# Altium PCB nrf24l01_cell(P40).PcbDoc (part 9 of 11)
Units mm, origin at the board's own origin, x right, y up, seen from the top; angles counter-clockwise.
Board outline 136.2 x 112.2 mm, 2 copper layers (TopLayer, BottomLayer); 520 components, 0 nets, 2804 pads, 1040 vias.
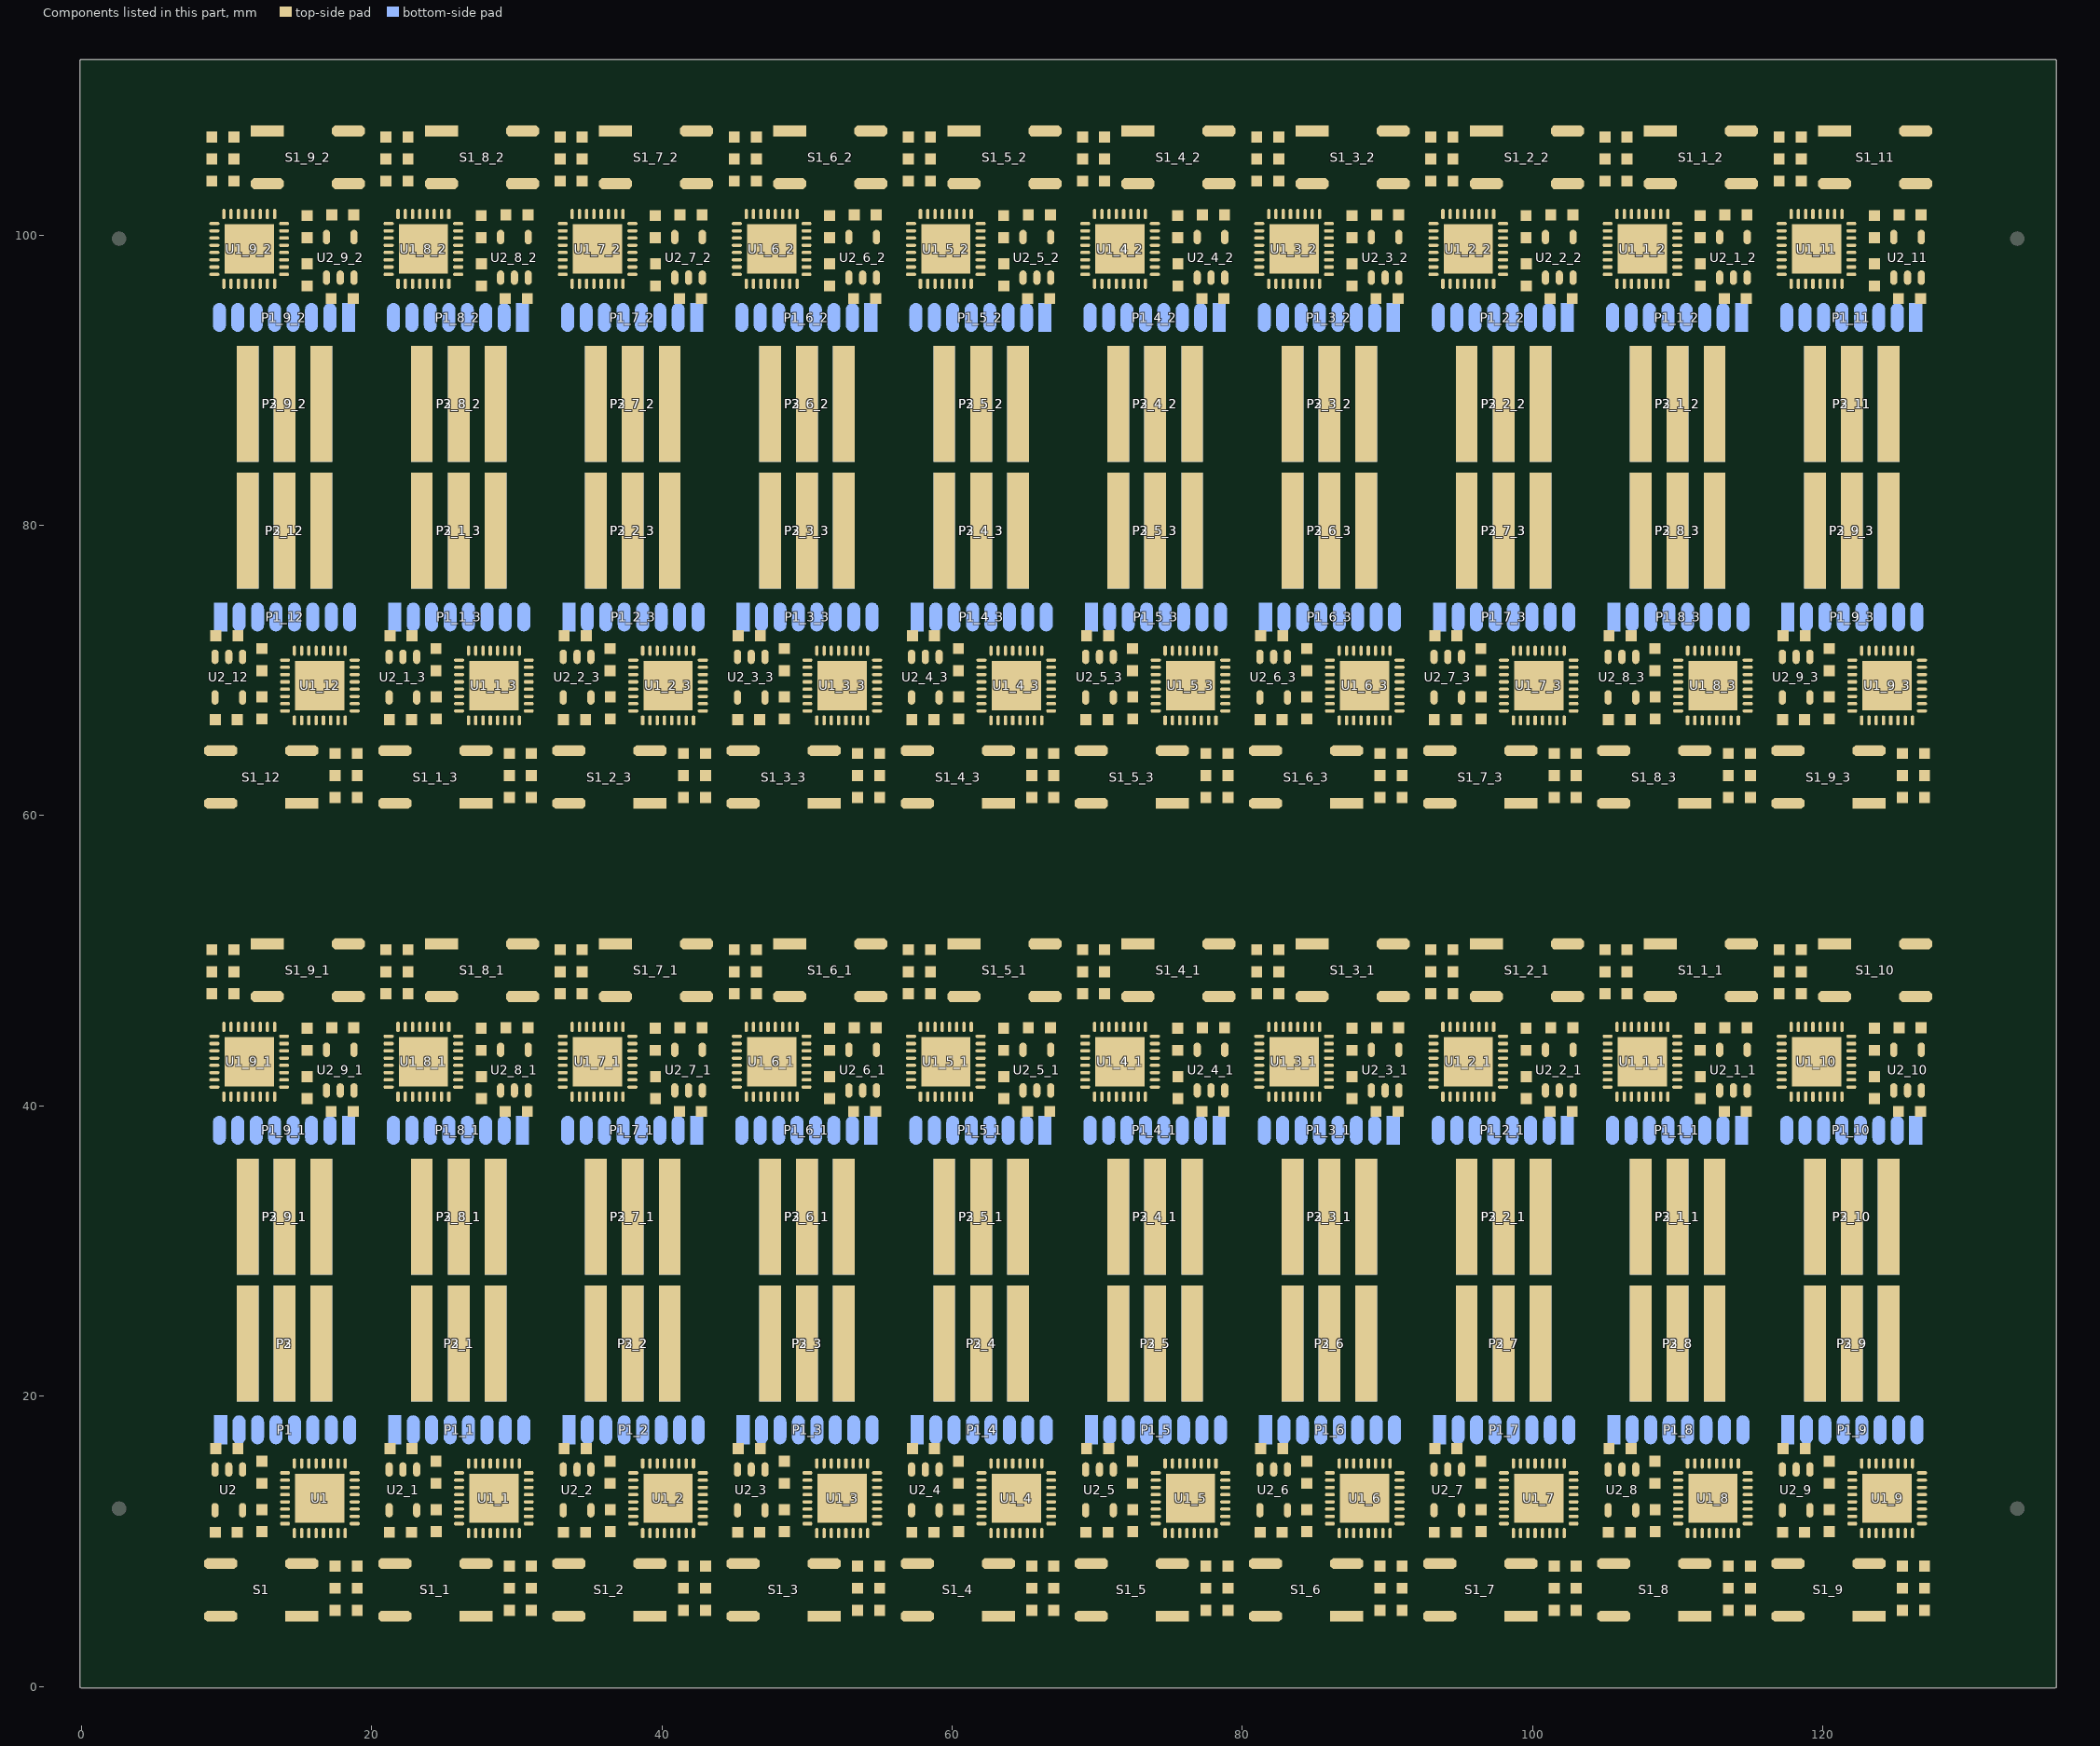
[diagram p9: the components of this part, seen from the top]

## Via types
v1: diameter 0.4, hole 0.2, TopLayer to BottomLayer, tented both sides, 1040 vias

## Nets (pads, with @x,y where several pads share a name; then routed paths per layer and width w, separated by ;. In a path a pad name is that pad's centre, name@x,y a point inside that pad or via, vN(x,y) a via of type N, cw(c..) or ccw(c..) an arc to the next point about the centre after c; other vN are vias at no path point) (continued)
copper on no net: (continued)
  BottomLayer w0.203: v1@8.48,38.15 ccw(c8.312,38.318) 8.55,38.318 ccw(c8.788,38.318) v1@8.62,38.15 ; v1@8.48,43.72 cw(c8.312,43.552) 8.55,43.552 cw(c8.788,43.552) v1@8.62,43.72 ; v1@8.48,94.15 ccw(c8.312,94.318) 8.55,94.318 ccw(c8.788,94.318) v1@8.62,94.15 ; v1@8.48,99.72 cw(c8.312,99.552) 8.55,99.552 cw(c8.788,99.552) v1@8.62,99.72 ; v1(8.55,38.08) v1(8.55,43.79) ; v1(8.55,94.08) v1(8.55,99.79) ; v1@8.62,17.86 cw(c8.428,17.668) 8.7,17.668 ; v1@8.62,73.86 cw(c8.428,73.668) 8.7,73.668 ; 8.7,17.717 cw(c8.903,17.717) v1@8.76,17.86 ; 8.7,73.717 cw(c8.903,73.717) v1@8.76,73.86 ; v1@8.75,17.93 8.7,17.88 8.7,14.05 9.776,12.974 11.776,12.974 v1(14.03,10.72) ; v1@8.75,73.93 8.7,73.88 8.7,70.05 9.776,68.974 11.776,68.974 v1(14.03,66.72) ; v1(9.01,46.21) 12.03,46.21 v1(14.73,43.51) 14.75,43.49 14.75,42.62 ; v1(9.01,102.21) 12.03,102.21 v1(14.73,99.51) 14.75,99.49 14.75,98.62 ; v1@9.08,46.14 cw(c9.248,45.972) 9.248,46.21 cw(c9.248,46.448) v1@9.08,46.28 ; v1@9.08,102.14 cw(c9.248,101.972) 9.248,102.21 cw(c9.248,102.448) v1@9.08,102.28 ; 9.6,17.68 9.36,17.44 9.36,13.97 9.95,13.38 13.25,13.38 ; 9.6,73.68 9.36,73.44 9.36,69.97 9.95,69.38 13.25,69.38 ; 11.105,19.838 cw(c10.674,19.18) v1@11.46,19.18 ; 11.105,75.838 cw(c10.674,75.18) v1@11.46,75.18 ; 11.216,20.008 cw(c10.92,19.556) 11.46,19.556 cw(c12,19.556) 11.704,20.008 ; 11.216,76.008 cw(c10.92,75.556) 11.46,75.556 cw(c12,75.556) 11.704,76.008 ; v1@11.39,19.21 ccw(c11.222,19.378) 11.46,19.378 ccw(c11.698,19.378) v1@11.53,19.21 ; v1@11.39,75.21 ccw(c11.222,75.378) 11.46,75.378 ccw(c11.698,75.378) v1@11.53,75.21 ; 11.46,23.63 v1@11.46,19.18 ; 11.46,79.63 v1@11.46,75.18 ; 11.815,19.838 ccw(c12.246,19.18) v1@11.46,19.18 ; 11.815,75.838 ccw(c12.246,75.18) v1@11.46,75.18 ; v1@12.79,19.468 ccw(c12.79,19.706) 12.958,19.538 ccw(c13.126,19.37) v1@12.888,19.37 ; v1@12.79,75.468 ccw(c12.79,75.706) 12.958,75.538 ccw(c13.126,75.37) v1@12.888,75.37 ; 13.035,19.615 ccw(c12.269,20.38) 13.352,20.38 ; 13.035,75.615 ccw(c12.269,76.38) 13.352,76.38 ; 13.076,19.656 cw(c13.787,18.944) 13.935,19.94 ; 13.076,75.656 cw(c13.787,74.944) 13.935,75.94 ; v1@13.18,13.87 cw(c13.012,13.702) 13.25,13.702 cw(c13.488,13.702) v1@13.32,13.87 ; v1@13.18,69.87 cw(c13.012,69.702) 13.25,69.702 cw(c13.488,69.702) v1@13.32,69.87 ; 13.25,12.776 ccw(c13.556,12.776) v1@13.34,12.56 ; v1(13.25,13.94) 13.25,13.38 ; 13.25,68.776 ccw(c13.556,68.776) v1@13.34,68.56 ; v1(13.25,69.94) 13.25,69.38 ; v1@13.27,12.392 cw(c13.27,12.154) 13.438,12.322 cw(c13.606,12.49) v1@13.368,12.49 ; v1@13.27,68.392 cw(c13.27,68.154) 13.438,68.322 cw(c13.606,68.49) v1@13.368,68.49 ; 13.361,19.941 cw(c13.861,19.441) 13.965,20.141 ; 13.361,75.941 cw(c13.861,75.441) 13.965,76.141 ; 13.905,19.739 ccw(c13.714,18.446) v1(12.79,19.37) 14,20.58 14,23.63 ; 13.905,75.739 ccw(c13.714,74.446) v1(12.79,75.37) 14,76.58 14,79.63 ; v1@13.932,10.72 ccw(c13.694,10.72) 13.862,10.888 ccw(c14.03,11.056) v1@14.03,10.818 ; v1@13.932,66.72 ccw(c13.694,66.72) 13.862,66.888 ccw(c14.03,67.056) v1@14.03,66.818 ; v1@13.97,45.182 cw(c13.97,44.944) 14.138,45.112 cw(c14.306,45.28) v1@14.068,45.28 ; v1(13.97,45.28) 16.224,43.026 18.224,43.026 19.3,41.95 19.3,38.12 v1@19.25,38.07 ; v1@13.97,101.182 cw(c13.97,100.944) 14.138,101.112 cw(c14.306,101.28) v1@14.068,101.28 ; v1(13.97,101.28) 16.224,99.026 18.224,99.026 19.3,97.95 19.3,94.12 v1@19.25,94.07 ; 14,32.37 14,35.42 v1(15.21,36.63) cw(c14.286,37.554) 14.095,36.261 ; 14,88.37 14,91.42 v1(15.21,92.63) cw(c14.286,93.554) 14.095,92.261 ; 14.035,35.859 ccw(c14.139,36.559) 14.639,36.059 ; 14.035,91.859 ccw(c14.139,92.559) 14.639,92.059 ; 14.065,36.06 ccw(c14.213,37.056) 14.924,36.344 ; 14.065,92.06 ccw(c14.213,93.056) 14.924,92.344 ; v1@14.632,43.51 ccw(c14.394,43.51) 14.562,43.678 ccw(c14.73,43.846) v1@14.73,43.608 ; v1@14.632,99.51 ccw(c14.394,99.51) 14.562,99.678 ccw(c14.73,99.846) v1@14.73,99.608 ; 14.648,35.62 cw(c15.731,35.62) 14.965,36.385 ; 14.648,91.62 cw(c15.731,91.62) 14.965,92.385 ; v1@14.66,43.44 cw(c14.444,43.224) 14.75,43.224 ; v1@14.66,99.44 cw(c14.444,99.224) 14.75,99.224 ; v1@14.68,42.13 ccw(c14.512,42.298) 14.75,42.298 ccw(c14.988,42.298) v1@14.82,42.13 ; v1@14.68,98.13 ccw(c14.512,98.298) 14.75,98.298 ccw(c14.988,98.298) v1@14.82,98.13 ; v1(14.75,42.06) 14.75,42.62 ; v1(14.75,98.06) 14.75,98.62 ; v1@15.112,36.63 cw(c14.874,36.63) 15.042,36.462 cw(c15.21,36.294) v1@15.21,36.532 ; v1@15.112,92.63 cw(c14.874,92.63) 15.042,92.462 cw(c15.21,92.294) v1@15.21,92.532 ; 16.185,36.162 ccw(c15.754,36.82) v1@16.54,36.82 ; 16.185,92.162 ccw(c15.754,92.82) v1@16.54,92.82 ; 16.296,35.992 ccw(c16,36.444) 16.54,36.444 ccw(c17.08,36.444) 16.784,35.992 ; 16.296,91.992 ccw(c16,92.444) 16.54,92.444 ccw(c17.08,92.444) 16.784,91.992 ; v1@16.47,36.79 cw(c16.302,36.622) 16.54,36.622 cw(c16.778,36.622) v1@16.61,36.79 ; v1@16.47,92.79 cw(c16.302,92.622) 16.54,92.622 cw(c16.778,92.622) v1@16.61,92.79 ; 16.54,32.37 v1@16.54,36.82 ; 16.54,88.37 v1@16.54,92.82 ; 16.895,36.162 cw(c17.326,36.82) v1@16.54,36.82 ; 16.895,92.162 cw(c17.326,92.82) v1@16.54,92.82 ; 18.4,38.32 18.64,38.56 18.64,42.03 18.05,42.62 14.75,42.62 ; 18.4,94.32 18.64,94.56 18.64,98.03 18.05,98.62 14.75,98.62 ; v1@18.92,9.72 ccw(c18.752,9.552) 18.752,9.79 ccw(c18.752,10.028) v1@18.92,9.86 ; v1@18.92,65.72 ccw(c18.752,65.552) 18.752,65.79 ccw(c18.752,66.028) v1@18.92,65.86 ; v1(18.99,9.79) 15.97,9.79 v1(13.27,12.49) 13.25,12.51 13.25,13.38 ; v1(18.99,65.79) 15.97,65.79 v1(13.27,68.49) 13.25,68.51 13.25,69.38 ; v1@19.24,38.14 ccw(c19.097,38.283) 19.3,38.283 ; v1@19.24,94.14 ccw(c19.097,94.283) 19.3,94.283 ; 19.3,38.332 ccw(c19.572,38.332) v1@19.38,38.14 ; 19.3,94.332 ccw(c19.572,94.332) v1@19.38,94.14 ; v1@19.38,12.28 ccw(c19.212,12.448) 19.45,12.448 ccw(c19.688,12.448) v1@19.52,12.28 ; v1@19.38,17.85 cw(c19.212,17.682) 19.45,17.682 cw(c19.688,17.682) v1@19.52,17.85 ; v1@19.38,68.28 ccw(c19.212,68.448) 19.45,68.448 ccw(c19.688,68.448) v1@19.52,68.28 ; v1@19.38,73.85 cw(c19.212,73.682) 19.45,73.682 cw(c19.688,73.682) v1@19.52,73.85 ; v1(19.45,12.21) v1(19.45,17.92) ; v1(19.45,68.21) v1(19.45,73.92) ; v1@20.48,38.15 ccw(c20.312,38.318) 20.55,38.318 ccw(c20.788,38.318) v1@20.62,38.15 ; v1@20.48,43.72 cw(c20.312,43.552) 20.55,43.552 cw(c20.788,43.552) v1@20.62,43.72 ; v1@20.48,94.15 ccw(c20.312,94.318) 20.55,94.318 ccw(c20.788,94.318) v1@20.62,94.15 ; v1@20.48,99.72 cw(c20.312,99.552) 20.55,99.552 cw(c20.788,99.552) v1@20.62,99.72 ; v1(20.55,38.08) v1(20.55,43.79) ; v1(20.55,94.08) v1(20.55,99.79) ; v1@20.62,17.86 cw(c20.428,17.668) 20.7,17.668 ; v1@20.62,73.86 cw(c20.428,73.668) 20.7,73.668 ; 20.7,17.717 cw(c20.903,17.717) v1@20.76,17.86 ; 20.7,73.717 cw(c20.903,73.717) v1@20.76,73.86 ; v1@20.75,17.93 20.7,17.88 20.7,14.05 21.776,12.974 23.776,12.974 v1(26.03,10.72) ; v1@20.75,73.93 20.7,73.88 20.7,70.05 21.776,68.974 23.776,68.974 v1(26.03,66.72) ; v1(21.01,46.21) 24.03,46.21 v1(26.73,43.51) 26.75,43.49 26.75,42.62 ; v1(21.01,102.21) 24.03,102.21 v1(26.73,99.51) 26.75,99.49 26.75,98.62 ; v1@21.08,46.14 cw(c21.248,45.972) 21.248,46.21 cw(c21.248,46.448) v1@21.08,46.28 ; v1@21.08,102.14 cw(c21.248,101.972) 21.248,102.21 cw(c21.248,102.448) v1@21.08,102.28 ; 21.6,17.68 21.36,17.44 21.36,13.97 21.95,13.38 25.25,13.38 ; 21.6,73.68 21.36,73.44 21.36,69.97 21.95,69.38 25.25,69.38 ; 23.105,19.838 cw(c22.674,19.18) v1@23.46,19.18 ; 23.105,75.838 cw(c22.674,75.18) v1@23.46,75.18 ; 23.216,20.008 cw(c22.92,19.556) 23.46,19.556 cw(c24,19.556) 23.704,20.008 ; 23.216,76.008 cw(c22.92,75.556) 23.46,75.556 cw(c24,75.556) 23.704,76.008 ; v1@23.39,19.21 ccw(c23.222,19.378) 23.46,19.378 ccw(c23.698,19.378) v1@23.53,19.21 ; v1@23.39,75.21 ccw(c23.222,75.378) 23.46,75.378 ccw(c23.698,75.378) v1@23.53,75.21 ; 23.46,23.63 v1@23.46,19.18 ; 23.46,79.63 v1@23.46,75.18 ; 23.815,19.838 ccw(c24.246,19.18) v1@23.46,19.18 ; 23.815,75.838 ccw(c24.246,75.18) v1@23.46,75.18 ; v1@24.79,19.468 ccw(c24.79,19.706) 24.958,19.538 ccw(c25.126,19.37) v1@24.888,19.37 ; v1@24.79,75.468 ccw(c24.79,75.706) 24.958,75.538 ccw(c25.126,75.37) v1@24.888,75.37 ; 25.035,19.615 ccw(c24.269,20.38) 25.352,20.38 ; 25.035,75.615 ccw(c24.269,76.38) 25.352,76.38 ; 25.076,19.656 cw(c25.787,18.944) 25.935,19.94 ; 25.076,75.656 cw(c25.787,74.944) 25.935,75.94 ; v1@25.18,13.87 cw(c25.012,13.702) 25.25,13.702 cw(c25.488,13.702) v1@25.32,13.87 ; v1@25.18,69.87 cw(c25.012,69.702) 25.25,69.702 cw(c25.488,69.702) v1@25.32,69.87 ; 25.25,12.776 ccw(c25.556,12.776) v1@25.34,12.56 ; v1(25.25,13.94) 25.25,13.38 ; 25.25,68.776 ccw(c25.556,68.776) v1@25.34,68.56 ; v1(25.25,69.94) 25.25,69.38 ; v1@25.27,12.392 cw(c25.27,12.154) 25.438,12.322 cw(c25.606,12.49) v1@25.368,12.49 ; v1@25.27,68.392 cw(c25.27,68.154) 25.438,68.322 cw(c25.606,68.49) v1@25.368,68.49 ; 25.361,19.941 cw(c25.861,19.441) 25.965,20.141 ; 25.361,75.941 cw(c25.861,75.441) 25.965,76.141 ; 25.905,19.739 ccw(c25.714,18.446) v1(24.79,19.37) 26,20.58 26,23.63 ; 25.905,75.739 ccw(c25.714,74.446) v1(24.79,75.37) 26,76.58 26,79.63 ; v1@25.932,10.72 ccw(c25.694,10.72) 25.862,10.888 ccw(c26.03,11.056) v1@26.03,10.818 ; v1@25.932,66.72 ccw(c25.694,66.72) 25.862,66.888 ccw(c26.03,67.056) v1@26.03,66.818 ; v1@25.97,45.182 cw(c25.97,44.944) 26.138,45.112 cw(c26.306,45.28) v1@26.068,45.28 ; v1(25.97,45.28) 28.224,43.026 30.224,43.026 31.3,41.95 31.3,38.12 v1@31.25,38.07 ; v1@25.97,101.182 cw(c25.97,100.944) 26.138,101.112 cw(c26.306,101.28) v1@26.068,101.28 ; v1(25.97,101.28) 28.224,99.026 30.224,99.026 31.3,97.95 31.3,94.12 v1@31.25,94.07 ; 26,32.37 26,35.42 v1(27.21,36.63) cw(c26.286,37.554) 26.095,36.261 ; 26,88.37 26,91.42 v1(27.21,92.63) cw(c26.286,93.554) 26.095,92.261 ; 26.035,35.859 ccw(c26.139,36.559) 26.639,36.059 ; 26.035,91.859 ccw(c26.139,92.559) 26.639,92.059 ; 26.065,36.06 ccw(c26.213,37.056) 26.924,36.344 ; 26.065,92.06 ccw(c26.213,93.056) 26.924,92.344 ; v1@26.632,43.51 ccw(c26.394,43.51) 26.562,43.678 ccw(c26.73,43.846) v1@26.73,43.608 ; v1@26.632,99.51 ccw(c26.394,99.51) 26.562,99.678 ccw(c26.73,99.846) v1@26.73,99.608 ; 26.648,35.62 cw(c27.731,35.62) 26.965,36.385 ; 26.648,91.62 cw(c27.731,91.62) 26.965,92.385 ; v1@26.66,43.44 cw(c26.444,43.224) 26.75,43.224 ; v1@26.66,99.44 cw(c26.444,99.224) 26.75,99.224 ; v1@26.68,42.13 ccw(c26.512,42.298) 26.75,42.298 ccw(c26.988,42.298) v1@26.82,42.13 ; v1@26.68,98.13 ccw(c26.512,98.298) 26.75,98.298 ccw(c26.988,98.298) v1@26.82,98.13 ; v1(26.75,42.06) 26.75,42.62 ; v1(26.75,98.06) 26.75,98.62 ; v1@27.112,36.63 cw(c26.874,36.63) 27.042,36.462 cw(c27.21,36.294) v1@27.21,36.532 ; v1@27.112,92.63 cw(c26.874,92.63) 27.042,92.462 cw(c27.21,92.294) v1@27.21,92.532 ; 28.185,36.162 ccw(c27.754,36.82) v1@28.54,36.82 ; 28.185,92.162 ccw(c27.754,92.82) v1@28.54,92.82 ; 28.296,35.992 ccw(c28,36.444) 28.54,36.444 ccw(c29.08,36.444) 28.784,35.992 ; 28.296,91.992 ccw(c28,92.444) 28.54,92.444 ccw(c29.08,92.444) 28.784,91.992 ; v1@28.47,36.79 cw(c28.302,36.622) 28.54,36.622 cw(c28.778,36.622) v1@28.61,36.79 ; v1@28.47,92.79 cw(c28.302,92.622) 28.54,92.622 cw(c28.778,92.622) v1@28.61,92.79 ; 28.54,32.37 v1@28.54,36.82 ; 28.54,88.37 v1@28.54,92.82 ; 28.895,36.162 cw(c29.326,36.82) v1@28.54,36.82 ; 28.895,92.162 cw(c29.326,92.82) v1@28.54,92.82 ; 30.4,38.32 30.64,38.56 30.64,42.03 30.05,42.62 26.75,42.62 ; 30.4,94.32 30.64,94.56 30.64,98.03 30.05,98.62 26.75,98.62 ; v1@30.92,9.72 ccw(c30.752,9.552) 30.752,9.79 ccw(c30.752,10.028) v1@30.92,9.86 ; v1@30.92,65.72 ccw(c30.752,65.552) 30.752,65.79 ccw(c30.752,66.028) v1@30.92,65.86 ; v1(30.99,9.79) 27.97,9.79 v1(25.27,12.49) 25.25,12.51 25.25,13.38 ; v1(30.99,65.79) 27.97,65.79 v1(25.27,68.49) 25.25,68.51 25.25,69.38 ; v1@31.24,38.14 ccw(c31.097,38.283) 31.3,38.283 ; v1@31.24,94.14 ccw(c31.097,94.283) 31.3,94.283 ; 31.3,38.332 ccw(c31.572,38.332) v1@31.38,38.14 ; 31.3,94.332 ccw(c31.572,94.332) v1@31.38,94.14 ; v1@31.38,12.28 ccw(c31.212,12.448) 31.45,12.448 ccw(c31.688,12.448) v1@31.52,12.28 ; v1@31.38,17.85 cw(c31.212,17.682) 31.45,17.682 cw(c31.688,17.682) v1@31.52,17.85 ; v1@31.38,68.28 ccw(c31.212,68.448) 31.45,68.448 ccw(c31.688,68.448) v1@31.52,68.28 ; v1@31.38,73.85 cw(c31.212,73.682) 31.45,73.682 cw(c31.688,73.682) v1@31.52,73.85 ; v1(31.45,12.21) v1(31.45,17.92) ; v1(31.45,68.21) v1(31.45,73.92) ; v1@32.48,38.15 ccw(c32.312,38.318) 32.55,38.318 ccw(c32.788,38.318) v1@32.62,38.15 ; v1@32.48,43.72 cw(c32.312,43.552) 32.55,43.552 cw(c32.788,43.552) v1@32.62,43.72 ; v1@32.48,94.15 ccw(c32.312,94.318) 32.55,94.318 ccw(c32.788,94.318) v1@32.62,94.15 ; v1@32.48,99.72 cw(c32.312,99.552) 32.55,99.552 cw(c32.788,99.552) v1@32.62,99.72 ; v1(32.55,38.08) v1(32.55,43.79) ; v1(32.55,94.08) v1(32.55,99.79) ; v1@32.62,17.86 cw(c32.428,17.668) 32.7,17.668 ; v1@32.62,73.86 cw(c32.428,73.668) 32.7,73.668 ; 32.7,17.717 cw(c32.903,17.717) v1@32.76,17.86 ; 32.7,73.717 cw(c32.903,73.717) v1@32.76,73.86 ; v1@32.75,17.93 32.7,17.88 32.7,14.05 33.776,12.974 35.776,12.974 v1(38.03,10.72) ; v1@32.75,73.93 32.7,73.88 32.7,70.05 33.776,68.974 35.776,68.974 v1(38.03,66.72) ; v1(33.01,46.21) 36.03,46.21 v1(38.73,43.51) 38.75,43.49 38.75,42.62 ; v1(33.01,102.21) 36.03,102.21 v1(38.73,99.51) 38.75,99.49 38.75,98.62 ; v1@33.08,46.14 cw(c33.248,45.972) 33.248,46.21 cw(c33.248,46.448) v1@33.08,46.28 ; v1@33.08,102.14 cw(c33.248,101.972) 33.248,102.21 cw(c33.248,102.448) v1@33.08,102.28 ; 33.6,17.68 33.36,17.44 33.36,13.97 33.95,13.38 37.25,13.38 ; 33.6,73.68 33.36,73.44 33.36,69.97 33.95,69.38 37.25,69.38 ; 35.105,19.838 cw(c34.674,19.18) v1@35.46,19.18 ; 35.105,75.838 cw(c34.674,75.18) v1@35.46,75.18 ; 35.216,20.008 cw(c34.92,19.556) 35.46,19.556 cw(c36,19.556) 35.704,20.008 ; 35.216,76.008 cw(c34.92,75.556) 35.46,75.556 cw(c36,75.556) 35.704,76.008 ; v1@35.39,19.21 ccw(c35.222,19.378) 35.46,19.378 ccw(c35.698,19.378) v1@35.53,19.21 ; v1@35.39,75.21 ccw(c35.222,75.378) 35.46,75.378 ccw(c35.698,75.378) v1@35.53,75.21 ; 35.46,23.63 v1@35.46,19.18 ; 35.46,79.63 v1@35.46,75.18 ; 35.815,19.838 ccw(c36.246,19.18) v1@35.46,19.18 ; 35.815,75.838 ccw(c36.246,75.18) v1@35.46,75.18 ; v1@36.79,19.468 ccw(c36.79,19.706) 36.958,19.538 ccw(c37.126,19.37) v1@36.888,19.37 ; v1@36.79,75.468 ccw(c36.79,75.706) 36.958,75.538 ccw(c37.126,75.37) v1@36.888,75.37 ; 37.035,19.615 ccw(c36.269,20.38) 37.352,20.38 ; 37.035,75.615 ccw(c36.269,76.38) 37.352,76.38 ; 37.076,19.656 cw(c37.787,18.944) 37.935,19.94 ; 37.076,75.656 cw(c37.787,74.944) 37.935,75.94 ; v1@37.18,13.87 cw(c37.012,13.702) 37.25,13.702 cw(c37.488,13.702) v1@37.32,13.87 ; v1@37.18,69.87 cw(c37.012,69.702) 37.25,69.702 cw(c37.488,69.702) v1@37.32,69.87 ; 37.25,12.776 ccw(c37.556,12.776) v1@37.34,12.56 ; v1(37.25,13.94) 37.25,13.38 ; 37.25,68.776 ccw(c37.556,68.776) v1@37.34,68.56 ; v1(37.25,69.94) 37.25,69.38 ; v1@37.27,12.392 cw(c37.27,12.154) 37.438,12.322 cw(c37.606,12.49) v1@37.368,12.49 ; v1@37.27,68.392 cw(c37.27,68.154) 37.438,68.322 cw(c37.606,68.49) v1@37.368,68.49 ; 37.361,19.941 cw(c37.861,19.441) 37.965,20.141 ; 37.361,75.941 cw(c37.861,75.441) 37.965,76.141 ; 37.905,19.739 ccw(c37.714,18.446) v1(36.79,19.37) 38,20.58 38,23.63 ; 37.905,75.739 ccw(c37.714,74.446) v1(36.79,75.37) 38,76.58 38,79.63 ; v1@37.932,10.72 ccw(c37.694,10.72) 37.862,10.888 ccw(c38.03,11.056) v1@38.03,10.818 ; v1@37.932,66.72 ccw(c37.694,66.72) 37.862,66.888 ccw(c38.03,67.056) v1@38.03,66.818 ; v1@37.97,45.182 cw(c37.97,44.944) 38.138,45.112 cw(c38.306,45.28) v1@38.068,45.28 ; v1(37.97,45.28) 40.224,43.026 42.224,43.026 43.3,41.95 43.3,38.12 v1@43.25,38.07 ; v1@37.97,101.182 cw(c37.97,100.944) 38.138,101.112 cw(c38.306,101.28) v1@38.068,101.28 ; v1(37.97,101.28) 40.224,99.026 42.224,99.026 43.3,97.95 43.3,94.12 v1@43.25,94.07 ; 38,32.37 38,35.42 v1(39.21,36.63) cw(c38.286,37.554) 38.095,36.261 ; 38,88.37 38,91.42 v1(39.21,92.63) cw(c38.286,93.554) 38.095,92.261 ; 38.035,35.859 ccw(c38.139,36.559) 38.639,36.059 ; 38.035,91.859 ccw(c38.139,92.559) 38.639,92.059 ; 38.065,36.06 ccw(c38.213,37.056) 38.924,36.344 ; 38.065,92.06 ccw(c38.213,93.056) 38.924,92.344 ; v1@38.632,43.51 ccw(c38.394,43.51) 38.562,43.678 ccw(c38.73,43.846) v1@38.73,43.608 ; v1@38.632,99.51 ccw(c38.394,99.51) 38.562,99.678 ccw(c38.73,99.846) v1@38.73,99.608 ; 38.648,35.62 cw(c39.731,35.62) 38.965,36.385 ; 38.648,91.62 cw(c39.731,91.62) 38.965,92.385 ; v1@38.66,43.44 cw(c38.444,43.224) 38.75,43.224 ; v1@38.66,99.44 cw(c38.444,99.224) 38.75,99.224 ; v1@38.68,42.13 ccw(c38.512,42.298) 38.75,42.298 ccw(c38.988,42.298) v1@38.82,42.13 ; v1@38.68,98.13 ccw(c38.512,98.298) 38.75,98.298 ccw(c38.988,98.298) v1@38.82,98.13 ; v1(38.75,42.06) 38.75,42.62 ; v1(38.75,98.06) 38.75,98.62 ; v1@39.112,36.63 cw(c38.874,36.63) 39.042,36.462 cw(c39.21,36.294) v1@39.21,36.532 ; v1@39.112,92.63 cw(c38.874,92.63) 39.042,92.462 cw(c39.21,92.294) v1@39.21,92.532 ; 40.185,36.162 ccw(c39.754,36.82) v1@40.54,36.82 ; 40.185,92.162 ccw(c39.754,92.82) v1@40.54,92.82 ; 40.296,35.992 ccw(c40,36.444) 40.54,36.444 ccw(c41.08,36.444) 40.784,35.992 ; 40.296,91.992 ccw(c40,92.444) 40.54,92.444 ccw(c41.08,92.444) 40.784,91.992 ; v1@40.47,36.79 cw(c40.302,36.622) 40.54,36.622 cw(c40.778,36.622) v1@40.61,36.79 ; v1@40.47,92.79 cw(c40.302,92.622) 40.54,92.622 cw(c40.778,92.622) v1@40.61,92.79 ; 40.54,32.37 v1@40.54,36.82 ; 40.54,88.37 v1@40.54,92.82 ; 40.895,36.162 cw(c41.326,36.82) v1@40.54,36.82 ; 40.895,92.162 cw(c41.326,92.82) v1@40.54,92.82 ; 42.4,38.32 42.64,38.56 42.64,42.03 42.05,42.62 38.75,42.62 ; 42.4,94.32 42.64,94.56 42.64,98.03 42.05,98.62 38.75,98.62 ; v1@42.92,9.72 ccw(c42.752,9.552) 42.752,9.79 ccw(c42.752,10.028) v1@42.92,9.86 ; v1@42.92,65.72 ccw(c42.752,65.552) 42.752,65.79 ccw(c42.752,66.028) v1@42.92,65.86 ; v1(42.99,9.79) 39.97,9.79 v1(37.27,12.49) 37.25,12.51 37.25,13.38 ; v1(42.99,65.79) 39.97,65.79 v1(37.27,68.49) 37.25,68.51 37.25,69.38 ; v1@43.24,38.14 ccw(c43.097,38.283) 43.3,38.283 ; v1@43.24,94.14 ccw(c43.097,94.283) 43.3,94.283 ; 43.3,38.332 ccw(c43.572,38.332) v1@43.38,38.14 ; 43.3,94.332 ccw(c43.572,94.332) v1@43.38,94.14 ; v1@43.38,12.28 ccw(c43.212,12.448) 43.45,12.448 ccw(c43.688,12.448) v1@43.52,12.28 ; v1@43.38,17.85 cw(c43.212,17.682) 43.45,17.682 cw(c43.688,17.682) v1@43.52,17.85 ; v1@43.38,68.28 ccw(c43.212,68.448) 43.45,68.448 ccw(c43.688,68.448) v1@43.52,68.28 ; v1@43.38,73.85 cw(c43.212,73.682) 43.45,73.682 cw(c43.688,73.682) v1@43.52,73.85 ; v1(43.45,12.21) v1(43.45,17.92) ; v1(43.45,68.21) v1(43.45,73.92) ; v1@44.48,38.15 ccw(c44.312,38.318) 44.55,38.318 ccw(c44.788,38.318) v1@44.62,38.15 ; v1@44.48,43.72 cw(c44.312,43.552) 44.55,43.552 cw(c44.788,43.552) v1@44.62,43.72 ; v1@44.48,94.15 ccw(c44.312,94.318) 44.55,94.318 ccw(c44.788,94.318) v1@44.62,94.15 ; v1@44.48,99.72 cw(c44.312,99.552) 44.55,99.552 cw(c44.788,99.552) v1@44.62,99.72 ; v1(44.55,38.08) v1(44.55,43.79) ; v1(44.55,94.08) v1(44.55,99.79) ; v1@44.62,17.86 cw(c44.428,17.668) 44.7,17.668 ; v1@44.62,73.86 cw(c44.428,73.668) 44.7,73.668 ; 44.7,17.717 cw(c44.903,17.717) v1@44.76,17.86 ; 44.7,73.717 cw(c44.903,73.717) v1@44.76,73.86 ; v1@44.75,17.93 44.7,17.88 44.7,14.05 45.776,12.974 47.776,12.974 v1(50.03,10.72) ; v1@44.75,73.93 44.7,73.88 44.7,70.05 45.776,68.974 47.776,68.974 v1(50.03,66.72) ; v1(45.01,46.21) 48.03,46.21 v1(50.73,43.51) 50.75,43.49 50.75,42.62 ; v1(45.01,102.21) 48.03,102.21 v1(50.73,99.51) 50.75,99.49 50.75,98.62 ; v1@45.08,46.14 cw(c45.248,45.972) 45.248,46.21 cw(c45.248,46.448) v1@45.08,46.28 ; v1@45.08,102.14 cw(c45.248,101.972) 45.248,102.21 cw(c45.248,102.448) v1@45.08,102.28 ; 45.6,17.68 45.36,17.44 45.36,13.97 45.95,13.38 49.25,13.38 ; 45.6,73.68 45.36,73.44 45.36,69.97 45.95,69.38 49.25,69.38 ; 47.105,19.838 cw(c46.674,19.18) v1@47.46,19.18 ; 47.105,75.838 cw(c46.674,75.18) v1@47.46,75.18 ; 47.216,20.008 cw(c46.92,19.556) 47.46,19.556 cw(c48,19.556) 47.704,20.008 ; 47.216,76.008 cw(c46.92,75.556) 47.46,75.556 cw(c48,75.556) 47.704,76.008 ; v1@47.39,19.21 ccw(c47.222,19.378) 47.46,19.378 ccw(c47.698,19.378) v1@47.53,19.21 ; v1@47.39,75.21 ccw(c47.222,75.378) 47.46,75.378 ccw(c47.698,75.378) v1@47.53,75.21 ; 47.46,23.63 v1@47.46,19.18 ; 47.46,79.63 v1@47.46,75.18 ; 47.815,19.838 ccw(c48.246,19.18) v1@47.46,19.18 ; 47.815,75.838 ccw(c48.246,75.18) v1@47.46,75.18 ; v1@48.79,19.468 ccw(c48.79,19.706) 48.958,19.538 ccw(c49.126,19.37) v1@48.888,19.37 ; v1@48.79,75.468 ccw(c48.79,75.706) 48.958,75.538 ccw(c49.126,75.37) v1@48.888,75.37 ; 49.035,19.615 ccw(c48.269,20.38) 49.352,20.38 ; 49.035,75.615 ccw(c48.269,76.38) 49.352,76.38 ; 49.076,19.656 cw(c49.787,18.944) 49.935,19.94 ; 49.076,75.656 cw(c49.787,74.944) 49.935,75.94 ; v1@49.18,13.87 cw(c49.012,13.702) 49.25,13.702 cw(c49.488,13.702) v1@49.32,13.87 ; v1@49.18,69.87 cw(c49.012,69.702) 49.25,69.702 cw(c49.488,69.702) v1@49.32,69.87 ; 49.25,12.776 ccw(c49.556,12.776) v1@49.34,12.56 ; v1(49.25,13.94) 49.25,13.38 ; 49.25,68.776 ccw(c49.556,68.776) v1@49.34,68.56 ; v1(49.25,69.94) 49.25,69.38 ; v1@49.27,12.392 cw(c49.27,12.154) 49.438,12.322 cw(c49.606,12.49) v1@49.368,12.49 ; v1@49.27,68.392 cw(c49.27,68.154) 49.438,68.322 cw(c49.606,68.49) v1@49.368,68.49 ; 49.361,19.941 cw(c49.861,19.441) 49.965,20.141 ; 49.361,75.941 cw(c49.861,75.441) 49.965,76.141 ; 49.905,19.739 ccw(c49.714,18.446) v1(48.79,19.37) 50,20.58 50,23.63 ; 49.905,75.739 ccw(c49.714,74.446) v1(48.79,75.37) 50,76.58 50,79.63 ; v1@49.932,10.72 ccw(c49.694,10.72) 49.862,10.888 ccw(c50.03,11.056) v1@50.03,10.818 ; v1@49.932,66.72 ccw(c49.694,66.72) 49.862,66.888 ccw(c50.03,67.056) v1@50.03,66.818 ; v1@49.97,45.182 cw(c49.97,44.944) 50.138,45.112 cw(c50.306,45.28) v1@50.068,45.28 ; v1(49.97,45.28) 52.224,43.026 54.224,43.026 55.3,41.95 55.3,38.12 v1@55.25,38.07 ; v1@49.97,101.182 cw(c49.97,100.944) 50.138,101.112 cw(c50.306,101.28) v1@50.068,101.28 ; v1(49.97,101.28) 52.224,99.026 54.224,99.026 55.3,97.95 55.3,94.12 v1@55.25,94.07 ; 50,32.37 50,35.42 v1(51.21,36.63) cw(c50.286,37.554) 50.095,36.261 ; 50,88.37 50,91.42 v1(51.21,92.63) cw(c50.286,93.554) 50.095,92.261 ; 50.035,35.859 ccw(c50.139,36.559) 50.639,36.059 ; 50.035,91.859 ccw(c50.139,92.559) 50.639,92.059 ; 50.065,36.06 ccw(c50.213,37.056) 50.924,36.344 ; 50.065,92.06 ccw(c50.213,93.056) 50.924,92.344 ; v1@50.632,43.51 ccw(c50.394,43.51) 50.562,43.678 ccw(c50.73,43.846) v1@50.73,43.608 ; v1@50.632,99.51 ccw(c50.394,99.51) 50.562,99.678 ccw(c50.73,99.846) v1@50.73,99.608 ; 50.648,35.62 cw(c51.731,35.62) 50.965,36.385 ; 50.648,91.62 cw(c51.731,91.62) 50.965,92.385 ; v1@50.66,43.44 cw(c50.444,43.224) 50.75,43.224 ; v1@50.66,99.44 cw(c50.444,99.224) 50.75,99.224 ; v1@50.68,42.13 ccw(c50.512,42.298) 50.75,42.298 ccw(c50.988,42.298) v1@50.82,42.13 ; v1@50.68,98.13 ccw(c50.512,98.298) 50.75,98.298 ccw(c50.988,98.298) v1@50.82,98.13 ; v1(50.75,42.06) 50.75,42.62 ; v1(50.75,98.06) 50.75,98.62 ; v1@51.112,36.63 cw(c50.874,36.63) 51.042,36.462 cw(c51.21,36.294) v1@51.21,36.532 ; v1@51.112,92.63 cw(c50.874,92.63) 51.042,92.462 cw(c51.21,92.294) v1@51.21,92.532 ; 52.185,36.162 ccw(c51.754,36.82) v1@52.54,36.82 ; 52.185,92.162 ccw(c51.754,92.82) v1@52.54,92.82 ; 52.296,35.992 ccw(c52,36.444) 52.54,36.444 ccw(c53.08,36.444) 52.784,35.992 ; 52.296,91.992 ccw(c52,92.444) 52.54,92.444 ccw(c53.08,92.444) 52.784,91.992 ; v1@52.47,36.79 cw(c52.302,36.622) 52.54,36.622 cw(c52.778,36.622) v1@52.61,36.79 ; v1@52.47,92.79 cw(c52.302,92.622) 52.54,92.622 cw(c52.778,92.622) v1@52.61,92.79 ; 52.54,32.37 v1@52.54,36.82 ; 52.54,88.37 v1@52.54,92.82 ; 52.895,36.162 cw(c53.326,36.82) v1@52.54,36.82 ; 52.895,92.162 cw(c53.326,92.82) v1@52.54,92.82 ; 54.4,38.32 54.64,38.56 54.64,42.03 54.05,42.62 50.75,42.62 ; 54.4,94.32 54.64,94.56 54.64,98.03 54.05,98.62 50.75,98.62 ; v1@54.92,9.72 ccw(c54.752,9.552) 54.752,9.79 ccw(c54.752,10.028) v1@54.92,9.86 ; v1@54.92,65.72 ccw(c54.752,65.552) 54.752,65.79 ccw(c54.752,66.028) v1@54.92,65.86 ; v1(54.99,9.79) 51.97,9.79 v1(49.27,12.49) 49.25,12.51 49.25,13.38 ; v1(54.99,65.79) 51.97,65.79 v1(49.27,68.49) 49.25,68.51 49.25,69.38 ; v1@55.24,38.14 ccw(c55.097,38.283) 55.3,38.283 ; v1@55.24,94.14 ccw(c55.097,94.283) 55.3,94.283 ; 55.3,38.332 ccw(c55.572,38.332) v1@55.38,38.14 ; 55.3,94.332 ccw(c55.572,94.332) v1@55.38,94.14 ; v1@55.38,12.28 ccw(c55.212,12.448) 55.45,12.448 ccw(c55.688,12.448) v1@55.52,12.28 ; v1@55.38,17.85 cw(c55.212,17.682) 55.45,17.682 cw(c55.688,17.682) v1@55.52,17.85 ; v1@55.38,68.28 ccw(c55.212,68.448) 55.45,68.448 ccw(c55.688,68.448) v1@55.52,68.28 ; v1@55.38,73.85 cw(c55.212,73.682) 55.45,73.682 cw(c55.688,73.682) v1@55.52,73.85 ; v1(55.45,12.21) v1(55.45,17.92) ; v1(55.45,68.21) v1(55.45,73.92) ; v1@56.48,38.15 ccw(c56.312,38.318) 56.55,38.318 ccw(c56.788,38.318) v1@56.62,38.15 ; v1@56.48,43.72 cw(c56.312,43.552) 56.55,43.552 cw(c56.788,43.552) v1@56.62,43.72 ; v1@56.48,94.15 ccw(c56.312,94.318) 56.55,94.318 ccw(c56.788,94.318) v1@56.62,94.15 ; v1@56.48,99.72 cw(c56.312,99.552) 56.55,99.552 cw(c56.788,99.552) v1@56.62,99.72 ; v1(56.55,38.08) v1(56.55,43.79) ; v1(56.55,94.08) v1(56.55,99.79) ; v1@56.62,17.86 cw(c56.428,17.668) 56.7,17.668 ; v1@56.62,73.86 cw(c56.428,73.668) 56.7,73.668 ; 56.7,17.717 cw(c56.903,17.717) v1@56.76,17.86 ; 56.7,73.717 cw(c56.903,73.717) v1@56.76,73.86 ; v1@56.75,17.93 56.7,17.88 56.7,14.05 57.776,12.974 59.776,12.974 v1(62.03,10.72) ; v1@56.75,73.93 56.7,73.88 56.7,70.05 57.776,68.974 59.776,68.974 v1(62.03,66.72) ; v1(57.01,46.21) 60.03,46.21 v1(62.73,43.51) 62.75,43.49 62.75,42.62 ; v1(57.01,102.21) 60.03,102.21 v1(62.73,99.51) 62.75,99.49 62.75,98.62 ; v1@57.08,46.14 cw(c57.248,45.972) 57.248,46.21 cw(c57.248,46.448) v1@57.08,46.28 ; v1@57.08,102.14 cw(c57.248,101.972) 57.248,102.21 cw(c57.248,102.448) v1@57.08,102.28 ; 57.6,17.68 57.36,17.44 57.36,13.97 57.95,13.38 61.25,13.38 ; 57.6,73.68 57.36,73.44 57.36,69.97 57.95,69.38 61.25,69.38 ; 59.105,19.838 cw(c58.674,19.18) v1@59.46,19.18 ; 59.105,75.838 cw(c58.674,75.18) v1@59.46,75.18 ; 59.216,20.008 cw(c58.92,19.556) 59.46,19.556 cw(c60,19.556) 59.704,20.008 ; 59.216,76.008 cw(c58.92,75.556) 59.46,75.556 cw(c60,75.556) 59.704,76.008 ; v1@59.39,19.21 ccw(c59.222,19.378) 59.46,19.378 ccw(c59.698,19.378) v1@59.53,19.21 ; v1@59.39,75.21 ccw(c59.222,75.378) 59.46,75.378 ccw(c59.698,75.378) v1@59.53,75.21 ; 59.46,23.63 v1@59.46,19.18 ; 59.46,79.63 v1@59.46,75.18 ; 59.815,19.838 ccw(c60.246,19.18) v1@59.46,19.18 ; 59.815,75.838 ccw(c60.246,75.18) v1@59.46,75.18 ; v1@60.79,19.468 ccw(c60.79,19.706) 60.958,19.538 ccw(c61.126,19.37) v1@60.888,19.37 ; v1@60.79,75.468 ccw(c60.79,75.706) 60.958,75.538 ccw(c61.126,75.37) v1@60.888,75.37 ; 61.035,19.615 ccw(c60.269,20.38) 61.352,20.38 ; 61.035,75.615 ccw(c60.269,76.38) 61.352,76.38 ; 61.076,19.656 cw(c61.787,18.944) 61.935,19.94 ; 61.076,75.656 cw(c61.787,74.944) 61.935,75.94 ; v1@61.18,13.87 cw(c61.012,13.702) 61.25,13.702 cw(c61.488,13.702) v1@61.32,13.87 ; v1@61.18,69.87 cw(c61.012,69.702) 61.25,69.702 cw(c61.488,69.702) v1@61.32,69.87 ; 61.25,12.776 ccw(c61.556,12.776) v1@61.34,12.56 ; v1(61.25,13.94) 61.25,13.38 ; 61.25,68.776 ccw(c61.556,68.776) v1@61.34,68.56 ; v1(61.25,69.94) 61.25,69.38 ; v1@61.27,12.392 cw(c61.27,12.154) 61.438,12.322 cw(c61.606,12.49) v1@61.368,12.49 ; v1@61.27,68.392 cw(c61.27,68.154) 61.438,68.322 cw(c61.606,68.49) v1@61.368,68.49 ; 61.361,19.941 cw(c61.861,19.441) 61.965,20.141 ; 61.361,75.941 cw(c61.861,75.441) 61.965,76.141 ; 61.905,19.739 ccw(c61.714,18.446) v1(60.79,19.37) 62,20.58 62,23.63 ; 61.905,75.739 ccw(c61.714,74.446) v1(60.79,75.37) 62,76.58 62,79.63 ; v1@61.932,10.72 ccw(c61.694,10.72) 61.862,10.888 ccw(c62.03,11.056) v1@62.03,10.818 ; v1@61.932,66.72 ccw(c61.694,66.72) 61.862,66.888 ccw(c62.03,67.056) v1@62.03,66.818 ; v1@61.97,45.182 cw(c61.97,44.944) 62.138,45.112 cw(c62.306,45.28) v1@62.068,45.28 ; v1(61.97,45.28) 64.224,43.026 66.224,43.026 67.3,41.95 67.3,38.12 v1@67.25,38.07 ; v1@61.97,101.182 cw(c61.97,100.944) 62.138,101.112 cw(c62.306,101.28) v1@62.068,101.28 ; v1(61.97,101.28) 64.224,99.026 66.224,99.026 67.3,97.95 67.3,94.12 v1@67.25,94.07 ; 62,32.37 62,35.42 v1(63.21,36.63) cw(c62.286,37.554) 62.095,36.261 ; 62,88.37 62,91.42 v1(63.21,92.63) cw(c62.286,93.554) 62.095,92.261 ; 62.035,35.859 ccw(c62.139,36.559) 62.639,36.059 ; 62.035,91.859 ccw(c62.139,92.559) 62.639,92.059 ; 62.065,36.06 ccw(c62.213,37.056) 62.924,36.344 ; 62.065,92.06 ccw(c62.213,93.056) 62.924,92.344 ; v1@62.632,43.51 ccw(c62.394,43.51) 62.562,43.678 ccw(c62.73,43.846) v1@62.73,43.608 ; v1@62.632,99.51 ccw(c62.394,99.51) 62.562,99.678 ccw(c62.73,99.846) v1@62.73,99.608 ; 62.648,35.62 cw(c63.731,35.62) 62.965,36.385 ; 62.648,91.62 cw(c63.731,91.62) 62.965,92.385 ; v1@62.66,43.44 cw(c62.444,43.224) 62.75,43.224 ; v1@62.66,99.44 cw(c62.444,99.224) 62.75,99.224 ; v1@62.68,42.13 ccw(c62.512,42.298) 62.75,42.298 ccw(c62.988,42.298) v1@62.82,42.13 ; v1@62.68,98.13 ccw(c62.512,98.298) 62.75,98.298 ccw(c62.988,98.298) v1@62.82,98.13 ; v1(62.75,42.06) 62.75,42.62 ; v1(62.75,98.06) 62.75,98.62 ; v1@63.112,36.63 cw(c62.874,36.63) 63.042,36.462 cw(c63.21,36.294) v1@63.21,36.532 ; v1@63.112,92.63 cw(c62.874,92.63) 63.042,92.462 cw(c63.21,92.294) v1@63.21,92.532 ; 64.185,36.162 ccw(c63.754,36.82) v1@64.54,36.82 ; 64.185,92.162 ccw(c63.754,92.82) v1@64.54,92.82 ; 64.296,35.992 ccw(c64,36.444) 64.54,36.444 ccw(c65.08,36.444) 64.784,35.992 ; 64.296,91.992 ccw(c64,92.444) 64.54,92.444 ccw(c65.08,92.444) 64.784,91.992 ; v1@64.47,36.79 cw(c64.302,36.622) 64.54,36.622 cw(c64.778,36.622) v1@64.61,36.79 ; v1@64.47,92.79 cw(c64.302,92.622) 64.54,92.622 cw(c64.778,92.622) v1@64.61,92.79 ; 64.54,32.37 v1@64.54,36.82 ; 64.54,88.37 v1@64.54,92.82 ; 64.895,36.162 cw(c65.326,36.82) v1@64.54,36.82 ; 64.895,92.162 cw(c65.326,92.82) v1@64.54,92.82 ; 66.4,94.32 66.64,94.56 66.64,98.03 66.05,98.62 62.75,98.62 ; 66.4,38.32 66.64,38.56 66.64,42.03 66.05,42.62 62.75,42.62 ; v1@66.92,9.72 ccw(c66.752,9.552) 66.752,9.79 ccw(c66.752,10.028) v1@66.92,9.86 ; v1@66.92,65.72 ccw(c66.752,65.552) 66.752,65.79 ccw(c66.752,66.028) v1@66.92,65.86 ; v1(66.99,9.79) 63.97,9.79 v1(61.27,12.49) 61.25,12.51 61.25,13.38 ; v1(66.99,65.79) 63.97,65.79 v1(61.27,68.49) 61.25,68.51 61.25,69.38 ; v1@67.24,38.14 ccw(c67.097,38.283) 67.3,38.283 ; v1@67.24,94.14 ccw(c67.097,94.283) 67.3,94.283 ; 67.3,38.332 ccw(c67.572,38.332) v1@67.38,38.14 ; 67.3,94.332 ccw(c67.572,94.332) v1@67.38,94.14 ; v1@67.38,12.28 ccw(c67.212,12.448) 67.45,12.448 ccw(c67.688,12.448) v1@67.52,12.28 ; v1@67.38,17.85 cw(c67.212,17.682) 67.45,17.682 cw(c67.688,17.682) v1@67.52,17.85 ; v1@67.38,68.28 ccw(c67.212,68.448) 67.45,68.448 ccw(c67.688,68.448) v1@67.52,68.28 ; v1@67.38,73.85 cw(c67.212,73.682) 67.45,73.682 cw(c67.688,73.682) v1@67.52,73.85 ; v1(67.45,12.21) v1(67.45,17.92) ; v1(67.45,68.21) v1(67.45,73.92) ; v1@68.48,38.15 ccw(c68.312,38.318) 68.55,38.318 ccw(c68.788,38.318) v1@68.62,38.15 ; v1@68.48,43.72 cw(c68.312,43.552) 68.55,43.552 cw(c68.788,43.552) v1@68.62,43.72 ; v1@68.48,94.15 ccw(c68.312,94.318) 68.55,94.318 ccw(c68.788,94.318) v1@68.62,94.15 ; v1@68.48,99.72 cw(c68.312,99.552) 68.55,99.552 cw(c68.788,99.552) v1@68.62,99.72 ; v1(68.55,38.08) v1(68.55,43.79) ; v1(68.55,94.08) v1(68.55,99.79) ; v1@68.62,17.86 cw(c68.428,17.668) 68.7,17.668 ; v1@68.62,73.86 cw(c68.428,73.668) 68.7,73.668 ; 68.7,17.717 cw(c68.903,17.717) v1@68.76,17.86 ; 68.7,73.717 cw(c68.903,73.717) v1@68.76,73.86 ; v1@68.75,17.93 68.7,17.88 68.7,14.05 69.776,12.974 71.776,12.974 v1(74.03,10.72) ; v1@68.75,73.93 68.7,73.88 68.7,70.05 69.776,68.974 71.776,68.974 v1(74.03,66.72) ; v1(69.01,46.21) 72.03,46.21 v1(74.73,43.51) 74.75,43.49 74.75,42.62 ; v1(69.01,102.21) 72.03,102.21 v1(74.73,99.51) 74.75,99.49 74.75,98.62 ; v1@69.08,46.14 cw(c69.248,45.972) 69.248,46.21 cw(c69.248,46.448) v1@69.08,46.28 ; v1@69.08,102.14 cw(c69.248,101.972) 69.248,102.21 cw(c69.248,102.448) v1@69.08,102.28 ; 69.6,17.68 69.36,17.44 69.36,13.97 69.95,13.38 73.25,13.38 ; 69.6,73.68 69.36,73.44 69.36,69.97 69.95,69.38 73.25,69.38 ; 71.105,19.838 cw(c70.674,19.18) v1@71.46,19.18 ; 71.105,75.838 cw(c70.674,75.18) v1@71.46,75.18 ; 71.216,20.008 cw(c70.92,19.556) 71.46,19.556 cw(c72,19.556) 71.704,20.008 ; 71.216,76.008 cw(c70.92,75.556) 71.46,75.556 cw(c72,75.556) 71.704,76.008 ; v1@71.39,19.21 ccw(c71.222,19.378) 71.46,19.378 ccw(c71.698,19.378) v1@71.53,19.21 ; v1@71.39,75.21 ccw(c71.222,75.378) 71.46,75.378 ccw(c71.698,75.378) v1@71.53,75.21 ; 71.46,23.63 v1@71.46,19.18 ; 71.46,79.63 v1@71.46,75.18 ; 71.815,19.838 ccw(c72.246,19.18) v1@71.46,19.18 ; 71.815,75.838 ccw(c72.246,75.18) v1@71.46,75.18 ; v1@72.79,19.468 ccw(c72.79,19.706) 72.958,19.538 ccw(c73.126,19.37) v1@72.888,19.37 ; v1@72.79,75.468 ccw(c72.79,75.706) 72.958,75.538 ccw(c73.126,75.37) v1@72.888,75.37 ; 73.035,19.615 ccw(c72.269,20.38) 73.352,20.38 ; 73.035,75.615 ccw(c72.269,76.38) 73.352,76.38 ; 73.076,19.656 cw(c73.787,18.944) 73.935,19.94 ; 73.076,75.656 cw(c73.787,74.944) 73.935,75.94 ; v1@73.18,13.87 cw(c73.012,13.702) 73.25,13.702 cw(c73.488,13.702) v1@73.32,13.87 ; v1@73.18,69.87 cw(c73.012,69.702) 73.25,69.702 cw(c73.488,69.702) v1@73.32,69.87 ; 73.25,12.776 ccw(c73.556,12.776) v1@73.34,12.56 ; v1(73.25,13.94) 73.25,13.38 ; 73.25,68.776 ccw(c73.556,68.776) v1@73.34,68.56 ; v1(73.25,69.94) 73.25,69.38 ; v1@73.27,12.392 cw(c73.27,12.154) 73.438,12.322 cw(c73.606,12.49) v1@73.368,12.49 ; v1@73.27,68.392 cw(c73.27,68.154) 73.438,68.322 cw(c73.606,68.49) v1@73.368,68.49 ; 73.361,19.941 cw(c73.861,19.441) 73.965,20.141 ; 73.361,75.941 cw(c73.861,75.441) 73.965,76.141 ; 73.905,19.739 ccw(c73.714,18.446) v1(72.79,19.37) 74,20.58 74,23.63 ; 73.905,75.739 ccw(c73.714,74.446) v1(72.79,75.37) 74,76.58 74,79.63 ; v1@73.932,10.72 ccw(c73.694,10.72) 73.862,10.888 ccw(c74.03,11.056) v1@74.03,10.818 ; v1@73.932,66.72 ccw(c73.694,66.72) 73.862,66.888 ccw(c74.03,67.056) v1@74.03,66.818 ; v1@73.97,45.182 cw(c73.97,44.944) 74.138,45.112 cw(c74.306,45.28) v1@74.068,45.28 ; v1(73.97,45.28) 76.224,43.026 78.224,43.026 79.3,41.95 79.3,38.12 v1@79.25,38.07 ; v1@73.97,101.182 cw(c73.97,100.944) 74.138,101.112 cw(c74.306,101.28) v1@74.068,101.28 ; v1(73.97,101.28) 76.224,99.026 78.224,99.026 79.3,97.95 79.3,94.12 v1@79.25,94.07 ; 74,32.37 74,35.42 v1(75.21,36.63) ; 74,88.37 74,91.42 v1(75.21,92.63) ; 74.035,35.859 ccw(c74.139,36.559) 74.639,36.059 ; 74.035,91.859 ccw(c74.139,92.559) 74.639,92.059 ; 74.065,36.06 ccw(c74.213,37.056) 74.924,36.344 ; 74.065,92.06 ccw(c74.213,93.056) 74.924,92.344 ; 74.095,36.261 ccw(c74.286,37.554) v1(75.21,36.63) ; 74.095,92.261 ccw(c74.286,93.554) v1(75.21,92.63) ; v1@74.632,43.51 ccw(c74.394,43.51) 74.562,43.678 ccw(c74.73,43.846) v1@74.73,43.608 ; v1@74.632,99.51 ccw(c74.394,99.51) 74.562,99.678 ccw(c74.73,99.846) v1@74.73,99.608 ; 74.648,35.62 cw(c75.731,35.62) 74.965,36.385 ; 74.648,91.62 cw(c75.731,91.62) 74.965,92.385 ; v1@74.66,43.44 cw(c74.444,43.224) 74.75,43.224 ; v1@74.66,99.44 cw(c74.444,99.224) 74.75,99.224 ; v1@74.68,42.13 ccw(c74.512,42.298) 74.75,42.298 ccw(c74.988,42.298) v1@74.82,42.13 ; v1@74.68,98.13 ccw(c74.512,98.298) 74.75,98.298 ccw(c74.988,98.298) v1@74.82,98.13 ; v1(74.75,42.06) 74.75,42.62 ; v1(74.75,98.06) 74.75,98.62 ; v1@75.112,36.63 cw(c74.874,36.63) 75.042,36.462 cw(c75.21,36.294) v1@75.21,36.532 ; v1@75.112,92.63 cw(c74.874,92.63) 75.042,92.462 cw(c75.21,92.294) v1@75.21,92.532 ; 76.185,36.162 ccw(c75.754,36.82) v1@76.54,36.82 ; 76.185,92.162 ccw(c75.754,92.82) v1@76.54,92.82 ; 76.296,35.992 ccw(c76,36.444) 76.54,36.444 ccw(c77.08,36.444) 76.784,35.992 ; 76.296,91.992 ccw(c76,92.444) 76.54,92.444 ccw(c77.08,92.444) 76.784,91.992 ; v1@76.47,36.79 cw(c76.302,36.622) 76.54,36.622 cw(c76.778,36.622) v1@76.61,36.79 ; v1@76.47,92.79 cw(c76.302,92.622) 76.54,92.622 cw(c76.778,92.622) v1@76.61,92.79 ; 76.54,32.37 v1@76.54,36.82 ; 76.54,88.37 v1@76.54,92.82 ; 76.895,36.162 cw(c77.326,36.82) v1@76.54,36.82 ; 76.895,92.162 cw(c77.326,92.82) v1@76.54,92.82 ; 78.4,38.32 78.64,38.56 78.64,42.03 78.05,42.62 74.75,42.62 ; 78.4,94.32 78.64,94.56 78.64,98.03 78.05,98.62 74.75,98.62 ; v1@78.92,9.72 ccw(c78.752,9.552) 78.752,9.79 ccw(c78.752,10.028) v1@78.92,9.86 ; v1@78.92,65.72 ccw(c78.752,65.552) 78.752,65.79 ccw(c78.752,66.028) v1@78.92,65.86 ; v1(78.99,9.79) 75.97,9.79 v1(73.27,12.49) 73.25,12.51 73.25,13.38 ; v1(78.99,65.79) 75.97,65.79 v1(73.27,68.49) 73.25,68.51 73.25,69.38 ; v1@79.24,38.14 ccw(c79.097,38.283) 79.3,38.283 ; v1@79.24,94.14 ccw(c79.097,94.283) 79.3,94.283 ; 79.3,38.332 ccw(c79.572,38.332) v1@79.38,38.14 ; 79.3,94.332 ccw(c79.572,94.332) v1@79.38,94.14 ; v1@79.38,12.28 ccw(c79.212,12.448) 79.45,12.448 ccw(c79.688,12.448) v1@79.52,12.28 ; v1@79.38,17.85 cw(c79.212,17.682) 79.45,17.682 cw(c79.688,17.682) v1@79.52,17.85 ; v1@79.38,68.28 ccw(c79.212,68.448) 79.45,68.448 ccw(c79.688,68.448) v1@79.52,68.28 ; v1@79.38,73.85 cw(c79.212,73.682) 79.45,73.682 cw(c79.688,73.682) v1@79.52,73.85 ; v1(79.45,12.21) v1(79.45,17.92) ; v1(79.45,68.21) v1(79.45,73.92) ; v1@80.48,38.15 ccw(c80.312,38.318) 80.55,38.318 ccw(c80.788,38.318) v1@80.62,38.15 ; v1@80.48,43.72 cw(c80.312,43.552) 80.55,43.552 cw(c80.788,43.552) v1@80.62,43.72 ; v1@80.48,94.15 ccw(c80.312,94.318) 80.55,94.318 ccw(c80.788,94.318) v1@80.62,94.15 ; v1@80.48,99.72 cw(c80.312,99.552) 80.55,99.552 cw(c80.788,99.552) v1@80.62,99.72 ; v1(80.55,38.08) v1(80.55,43.79) ; v1(80.55,94.08) v1(80.55,99.79) ; v1@80.62,17.86 cw(c80.428,17.668) 80.7,17.668 ; v1@80.62,73.86 cw(c80.428,73.668) 80.7,73.668 ; 80.7,17.717 cw(c80.903,17.717) v1@80.76,17.86 ; 80.7,73.717 cw(c80.903,73.717) v1@80.76,73.86 ; v1@80.75,17.93 80.7,17.88 80.7,14.05 81.776,12.974 83.776,12.974 v1(86.03,10.72) ; v1@80.75,73.93 80.7,73.88 80.7,70.05 81.776,68.974 83.776,68.974 v1(86.03,66.72) ; v1(81.01,46.21) 84.03,46.21 v1(86.73,43.51) 86.75,43.49 86.75,42.62 ; v1(81.01,102.21) 84.03,102.21 v1(86.73,99.51) 86.75,99.49 86.75,98.62 ; v1@81.08,46.14 cw(c81.248,45.972) 81.248,46.21 cw(c81.248,46.448) v1@81.08,46.28 ; v1@81.08,102.14 cw(c81.248,101.972) 81.248,102.21 cw(c81.248,102.448) v1@81.08,102.28 ; 81.6,17.68 81.36,17.44 81.36,13.97 81.95,13.38 85.25,13.38 ; 81.6,73.68 81.36,73.44 81.36,69.97 81.95,69.38 85.25,69.38 ; 83.105,19.838 cw(c82.674,19.18) v1@83.46,19.18 ; 83.105,75.838 cw(c82.674,75.18) v1@83.46,75.18 ; 83.216,20.008 cw(c82.92,19.556) 83.46,19.556 cw(c84,19.556) 83.704,20.008 ; 83.216,76.008 cw(c82.92,75.556) 83.46,75.556 cw(c84,75.556) 83.704,76.008 ; v1@83.39,19.21 ccw(c83.222,19.378) 83.46,19.378 ccw(c83.698,19.378) v1@83.53,19.21 ; v1@83.39,75.21 ccw(c83.222,75.378) 83.46,75.378 ccw(c83.698,75.378) v1@83.53,75.21 ; 83.46,23.63 v1@83.46,19.18 ; 83.46,79.63 v1@83.46,75.18 ; 83.815,19.838 ccw(c84.246,19.18) v1@83.46,19.18 ; 83.815,75.838 ccw(c84.246,75.18) v1@83.46,75.18 ; v1@84.79,19.468 ccw(c84.79,19.706) 84.958,19.538 ccw(c85.126,19.37) v1@84.888,19.37 ; v1@84.79,75.468 ccw(c84.79,75.706) 84.958,75.538 ccw(c85.126,75.37) v1@84.888,75.37 ; 85.035,19.615 ccw(c84.269,20.38) 85.352,20.38 ; 85.035,75.615 ccw(c84.269,76.38) 85.352,76.38 ; 85.076,19.656 cw(c85.787,18.944) 85.935,19.94 ; 85.076,75.656 cw(c85.787,74.944) 85.935,75.94 ; v1@85.18,13.87 cw(c85.012,13.702) 85.25,13.702 cw(c85.488,13.702) v1@85.32,13.87 ; v1@85.18,69.87 cw(c85.012,69.702) 85.25,69.702 cw(c85.488,69.702) v1@85.32,69.87 ; 85.25,12.776 ccw(c85.556,12.776) v1@85.34,12.56 ; v1(85.25,13.94) 85.25,13.38 ; 85.25,68.776 ccw(c85.556,68.776) v1@85.34,68.56 ; v1(85.25,69.94) 85.25,69.38 ; v1@85.27,12.392 cw(c85.27,12.154) 85.438,12.322 cw(c85.606,12.49) v1@85.368,12.49 ; v1@85.27,68.392 cw(c85.27,68.154) 85.438,68.322 cw(c85.606,68.49) v1@85.368,68.49 ; 85.361,19.941 cw(c85.861,19.441) 85.965,20.141 ; 85.361,75.941 cw(c85.861,75.441) 85.965,76.141 ; 85.905,19.739 ccw(c85.714,18.446) v1(84.79,19.37) 86,20.58 86,23.63 ; 85.905,75.739 ccw(c85.714,74.446) v1(84.79,75.37) 86,76.58 86,79.63 ; v1@85.932,10.72 ccw(c85.694,10.72) 85.862,10.888 ccw(c86.03,11.056) v1@86.03,10.818 ; v1@85.932,66.72 ccw(c85.694,66.72) 85.862,66.888 ccw(c86.03,67.056) v1@86.03,66.818 ; v1@85.97,45.182 cw(c85.97,44.944) 86.138,45.112 cw(c86.306,45.28) v1@86.068,45.28 ; v1(85.97,45.28) 88.224,43.026 90.224,43.026 91.3,41.95 91.3,38.12 v1@91.25,38.07 ; v1@85.97,101.182 cw(c85.97,100.944) 86.138,101.112 cw(c86.306,101.28) v1@86.068,101.28 ; v1(85.97,101.28) 88.224,99.026 90.224,99.026 91.3,97.95 91.3,94.12 v1@91.25,94.07 ; 86,32.37 86,35.42 v1(87.21,36.63) cw(c86.286,37.554) 86.095,36.261 ; 86,88.37 86,91.42 v1(87.21,92.63) cw(c86.286,93.554) 86.095,92.261 ; 86.035,35.859 ccw(c86.139,36.559) 86.639,36.059 ; 86.035,91.859 ccw(c86.139,92.559) 86.639,92.059 ; 86.065,36.06 ccw(c86.213,37.056) 86.924,36.344 ; 86.065,92.06 ccw(c86.213,93.056) 86.924,92.344 ; v1@86.632,43.51 ccw(c86.394,43.51) 86.562,43.678 ccw(c86.73,43.846) v1@86.73,43.608 ; v1@86.632,99.51 ccw(c86.394,99.51) 86.562,99.678 ccw(c86.73,99.846) v1@86.73,99.608 ; 86.648,35.62 cw(c87.731,35.62) 86.965,36.385 ; 86.648,91.62 cw(c87.731,91.62) 86.965,92.385 ; v1@86.66,43.44 cw(c86.444,43.224) 86.75,43.224 ; v1@86.66,99.44 cw(c86.444,99.224) 86.75,99.224 ; v1@86.68,42.13 ccw(c86.512,42.298) 86.75,42.298 ccw(c86.988,42.298) v1@86.82,42.13 ; v1@86.68,98.13 ccw(c86.512,98.298) 86.75,98.298 ccw(c86.988,98.298) v1@86.82,98.13 ; v1(86.75,42.06) 86.75,42.62 ; v1(86.75,98.06) 86.75,98.62 ; v1@87.112,36.63 cw(c86.874,36.63) 87.042,36.462 cw(c87.21,36.294) v1@87.21,36.532 ; v1@87.112,92.63 cw(c86.874,92.63) 87.042,92.462 cw(c87.21,92.294) v1@87.21,92.532 ; 88.185,36.162 ccw(c87.754,36.82) v1@88.54,36.82 ; 88.185,92.162 ccw(c87.754,92.82) v1@88.54,92.82 ; 88.296,35.992 ccw(c88,36.444) 88.54,36.444 ccw(c89.08,36.444) 88.784,35.992 ; 88.296,91.992 ccw(c88,92.444) 88.54,92.444 ccw(c89.08,92.444) 88.784,91.992 ; v1@88.47,36.79 cw(c88.302,36.622) 88.54,36.622 cw(c88.778,36.622) v1@88.61,36.79 ; v1@88.47,92.79 cw(c88.302,92.622) 88.54,92.622 cw(c88.778,92.622) v1@88.61,92.79 ; 88.54,32.37 v1@88.54,36.82 ; 88.54,88.37 v1@88.54,92.82 ; 88.895,36.162 cw(c89.326,36.82) v1@88.54,36.82 ; 88.895,92.162 cw(c89.326,92.82) v1@88.54,92.82 ; 90.4,38.32 90.64,38.56 90.64,42.03 90.05,42.62 86.75,42.62 ; 90.4,94.32 90.64,94.56 90.64,98.03 90.05,98.62 86.75,98.62 ; v1@90.92,9.72 ccw(c90.752,9.552) 90.752,9.79 ccw(c90.752,10.028) v1@90.92,9.86 ; v1@90.92,65.72 ccw(c90.752,65.552) 90.752,65.79 ccw(c90.752,66.028) v1@90.92,65.86 ; v1(90.99,9.79) 87.97,9.79 v1(85.27,12.49) 85.25,12.51 85.25,13.38 ; v1(90.99,65.79) 87.97,65.79 v1(85.27,68.49) 85.25,68.51 85.25,69.38 ; v1@91.24,38.14 ccw(c91.097,38.283) 91.3,38.283 ; v1@91.24,94.14 ccw(c91.097,94.283) 91.3,94.283 ; 91.3,38.332 ccw(c91.572,38.332) v1@91.38,38.14 ; 91.3,94.332 ccw(c91.572,94.332) v1@91.38,94.14 ; v1@91.38,12.28 ccw(c91.212,12.448) 91.45,12.448 ccw(c91.688,12.448) v1@91.52,12.28 ; v1@91.38,17.85 cw(c91.212,17.682) 91.45,17.682 cw(c91.688,17.682) v1@91.52,17.85 ; v1@91.38,68.28 ccw(c91.212,68.448) 91.45,68.448 ccw(c91.688,68.448) v1@91.52,68.28 ; v1@91.38,73.85 cw(c91.212,73.682) 91.45,73.682 cw(c91.688,73.682) v1@91.52,73.85 ; v1(91.45,12.21) v1(91.45,17.92) ; v1(91.45,68.21) v1(91.45,73.92) ; v1@92.48,38.15 ccw(c92.312,38.318) 92.55,38.318 ccw(c92.788,38.318) v1@92.62,38.15 ; v1@92.48,43.72 cw(c92.312,43.552) 92.55,43.552 cw(c92.788,43.552) v1@92.62,43.72 ; v1@92.48,94.15 ccw(c92.312,94.318) 92.55,94.318 ccw(c92.788,94.318) v1@92.62,94.15 ; v1@92.48,99.72 cw(c92.312,99.552) 92.55,99.552 cw(c92.788,99.552) v1@92.62,99.72 ; v1(92.55,38.08) v1(92.55,43.79) ; v1(92.55,94.08) v1(92.55,99.79) ; v1@92.62,17.86 cw(c92.428,17.668) 92.7,17.668 ; v1@92.62,73.86 cw(c92.428,73.668) 92.7,73.668 ; 92.7,17.717 cw(c92.903,17.717) v1@92.76,17.86 ; 92.7,73.717 cw(c92.903,73.717) v1@92.76,73.86 ; v1@92.75,17.93 92.7,17.88 92.7,14.05 93.776,12.974 95.776,12.974 v1(98.03,10.72) ; v1@92.75,73.93 92.7,73.88 92.7,70.05 93.776,68.974 95.776,68.974 v1(98.03,66.72) ; v1(93.01,46.21) 96.03,46.21 v1(98.73,43.51) 98.75,43.49 98.75,42.62 ; v1(93.01,102.21) 96.03,102.21 v1(98.73,99.51) 98.75,99.49 98.75,98.62 ; v1@93.08,46.14 cw(c93.248,45.972) 93.248,46.21 cw(c93.248,46.448) v1@93.08,46.28 ; v1@93.08,102.14 cw(c93.248,101.972) 93.248,102.21 cw(c93.248,102.448) v1@93.08,102.28 ; 93.6,17.68 93.36,17.44 93.36,13.97 93.95,13.38 97.25,13.38 ; 93.6,73.68 93.36,73.44 93.36,69.97 93.95,69.38 97.25,69.38 ; 95.105,19.838 cw(c94.674,19.18) v1@95.46,19.18 ; 95.105,75.838 cw(c94.674,75.18) v1@95.46,75.18 ; 95.216,20.008 cw(c94.92,19.556) 95.46,19.556 cw(c96,19.556) 95.704,20.008 ; 95.216,76.008 cw(c94.92,75.556) 95.46,75.556 cw(c96,75.556) 95.704,76.008 ; v1@95.39,19.21 ccw(c95.222,19.378) 95.46,19.378 ccw(c95.698,19.378) v1@95.53,19.21 ; v1@95.39,75.21 ccw(c95.222,75.378) 95.46,75.378 ccw(c95.698,75.378) v1@95.53,75.21 ; 95.46,23.63 v1@95.46,19.18 ; 95.46,79.63 v1@95.46,75.18 ; 95.815,19.838 ccw(c96.246,19.18) v1@95.46,19.18 ; 95.815,75.838 ccw(c96.246,75.18) v1@95.46,75.18 ; v1@96.79,19.468 ccw(c96.79,19.706) 96.958,19.538 ccw(c97.126,19.37) v1@96.888,19.37 ; v1@96.79,75.468 ccw(c96.79,75.706) 96.958,75.538 ccw(c97.126,75.37) v1@96.888,75.37 ; 97.035,19.615 ccw(c96.269,20.38) 97.352,20.38 ; 97.035,75.615 ccw(c96.269,76.38) 97.352,76.38 ; 97.076,19.656 cw(c97.787,18.944) 97.935,19.94 ; 97.076,75.656 cw(c97.787,74.944) 97.935,75.94 ; v1@97.18,13.87 cw(c97.012,13.702) 97.25,13.702 cw(c97.488,13.702) v1@97.32,13.87 ; v1@97.18,69.87 cw(c97.012,69.702) 97.25,69.702 cw(c97.488,69.702) v1@97.32,69.87 ; 97.25,12.776 ccw(c97.556,12.776) v1@97.34,12.56 ; v1(97.25,13.94) 97.25,13.38 ; 97.25,68.776 ccw(c97.556,68.776) v1@97.34,68.56 ; v1(97.25,69.94) 97.25,69.38 ; v1@97.27,12.392 cw(c97.27,12.154) 97.438,12.322 cw(c97.606,12.49) v1@97.368,12.49 ; v1@97.27,68.392 cw(c97.27,68.154) 97.438,68.322 cw(c97.606,68.49) v1@97.368,68.49 ; 97.361,19.941 cw(c97.861,19.441) 97.965,20.141 ; 97.361,75.941 cw(c97.861,75.441) 97.965,76.141 ; 97.905,19.739 ccw(c97.714,18.446) v1(96.79,19.37) 98,20.58 98,23.63 ; 97.905,75.739 ccw(c97.714,74.446) v1(96.79,75.37) 98,76.58 98,79.63 ; v1@97.932,10.72 ccw(c97.694,10.72) 97.862,10.888 ccw(c98.03,11.056) v1@98.03,10.818 ; v1@97.932,66.72 ccw(c97.694,66.72) 97.862,66.888 ccw(c98.03,67.056) v1@98.03,66.818 ; v1@97.97,45.182 cw(c97.97,44.944) 98.138,45.112 cw(c98.306,45.28) v1@98.068,45.28 ; v1(97.97,45.28) 100.224,43.026 102.224,43.026 103.3,41.95 103.3,38.12 v1@103.25,38.07 ; v1@97.97,101.182 cw(c97.97,100.944) 98.138,101.112 cw(c98.306,101.28) v1@98.068,101.28 ; v1(97.97,101.28) 100.224,99.026 102.224,99.026 103.3,97.95 103.3,94.12 v1@103.25,94.07 ; 98,32.37 98,35.42 v1(99.21,36.63) cw(c98.286,37.554) 98.095,36.261 ; 98,88.37 98,91.42 v1(99.21,92.63) cw(c98.286,93.554) 98.095,92.261 ; 98.035,35.859 ccw(c98.139,36.559) 98.639,36.059 ; 98.035,91.859 ccw(c98.139,92.559) 98.639,92.059 ; 98.065,36.06 ccw(c98.213,37.056) 98.924,36.344 ; 98.065,92.06 ccw(c98.213,93.056) 98.924,92.344 ; v1@98.632,43.51 ccw(c98.394,43.51) 98.562,43.678 ccw(c98.73,43.846) v1@98.73,43.608 ; v1@98.632,99.51 ccw(c98.394,99.51) 98.562,99.678 ccw(c98.73,99.846) v1@98.73,99.608 ; 98.648,35.62 cw(c99.731,35.62) 98.965,36.385 ; 98.648,91.62 cw(c99.731,91.62) 98.965,92.385 ; v1@98.66,43.44 cw(c98.444,43.224) 98.75,43.224 ; v1@98.66,99.44 cw(c98.444,99.224) 98.75,99.224 ; v1@98.68,42.13 ccw(c98.512,42.298) 98.75,42.298 ccw(c98.988,42.298) v1@98.82,42.13 ; v1@98.68,98.13 ccw(c98.512,98.298) 98.75,98.298 ccw(c98.988,98.298) v1@98.82,98.13 ; v1(98.75,42.06) 98.75,42.62 ; v1(98.75,98.06) 98.75,98.62 ; v1@99.112,36.63 cw(c98.874,36.63) 99.042,36.462 cw(c99.21,36.294) v1@99.21,36.532 ; v1@99.112,92.63 cw(c98.874,92.63) 99.042,92.462 cw(c99.21,92.294) v1@99.21,92.532 ; 100.185,36.162 ccw(c99.754,36.82) v1@100.54,36.82 ; 100.185,92.162 ccw(c99.754,92.82) v1@100.54,92.82 ; 100.296,35.992 ccw(c100,36.444) 100.54,36.444 ccw(c101.08,36.444) 100.784,35.992 ; 100.296,91.992 ccw(c100,92.444) 100.54,92.444 ccw(c101.08,92.444) 100.784,91.992 ; v1@100.47,36.79 cw(c100.302,36.622) 100.54,36.622 cw(c100.778,36.622) v1@100.61,36.79 ; v1@100.47,92.79 cw(c100.302,92.622) 100.54,92.622 cw(c100.778,92.622) v1@100.61,92.79 ; 100.54,32.37 v1@100.54,36.82 ; 100.54,88.37 v1@100.54,92.82 ; 100.895,36.162 cw(c101.326,36.82) v1@100.54,36.82 ; 100.895,92.162 cw(c101.326,92.82) v1@100.54,92.82 ; 102.4,38.32 102.64,38.56 102.64,42.03 102.05,42.62 98.75,42.62 ; 102.4,94.32 102.64,94.56 102.64,98.03 102.05,98.62 98.75,98.62 ; v1@102.92,9.72 ccw(c102.752,9.552) 102.752,9.79 ccw(c102.752,10.028) v1@102.92,9.86 ; v1@102.92,65.72 ccw(c102.752,65.552) 102.752,65.79 ccw(c102.752,66.028) v1@102.92,65.86